# EAGLE board cell-breakout (EAGLE 6.2)
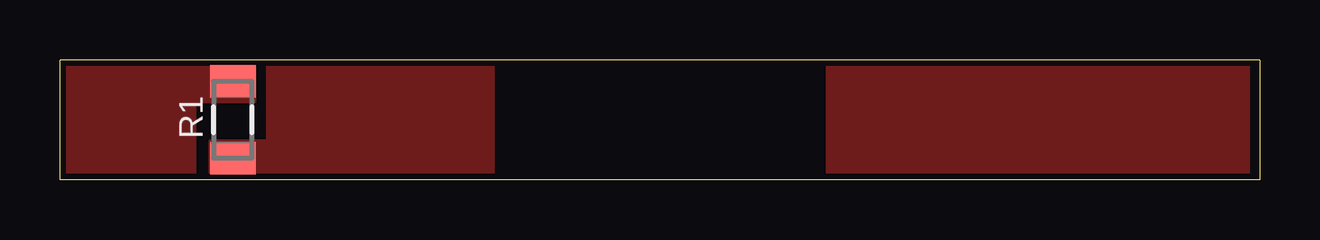
[diagram p0: board, top side]

Size 50 x 5 mm. Coordinates in mm from the lower left corner, seen from the top.
Outline: 0,0 0,5 50,5 50,0 0,0
Copper layers (1*16): Top 0.035mm / dielectric 1.5mm / Bottom 0.035mm
Design rules: minimum track width 10mil, minimum drill 24mil, track to track 8mil, track to pad 8mil, pad to pad 8mil, via to via 8mil, smd to smd 8mil, copper to edge 10mil, drill to drill 8mil, minimum pad ring 10mil, minimum via ring 8mil, stop-mask expansion 4mil, vias tented up to drill 0mil, thermal gap 10mil

## Footprints (pad centres in the part's own frame; a part is rotated, then mirrored left to right if it is on the bottom)
1206-A = smd 1.35 x 1.9: 1 -1.6,0; 2 1.6,0

## Placement (x,y rotation side)
R1  [1206-A]  7.2,2.5 90 top

## Library data of the parts
R1 = rcl_custom

## Nets
B+: R1.1
B+FUSED: R1.2

## Tracks (layer width: path | path; a pad name or v marks a point on that pad's centre or on a via)
B+
  pour Top (isolate 0.25, rank 3, no thermals): 8.7,5 18,5 18,0 6.3,0 6.3,1.6 8.7,1.6
B+FUSED
  pour Top (isolate 0.25, no thermals): 8.1,3.3 8.1,5 0,5 0,0 5.6,0 5.6,3.3
B-
  pour Top (rank 3, no thermals): 49.5,5 32,5 32,0 49.5,0